# Altium PCB Smartshell_v1.PcbDoc
Units mil, origin at the board's own origin, x right, y up, seen from the top; angles counter-clockwise.
Board outline 1773.01 x 2124.01 mil, 2 copper layers (Top Layer, Bottom Layer); 65 components, 77 nets, 270 pads, 38 vias.
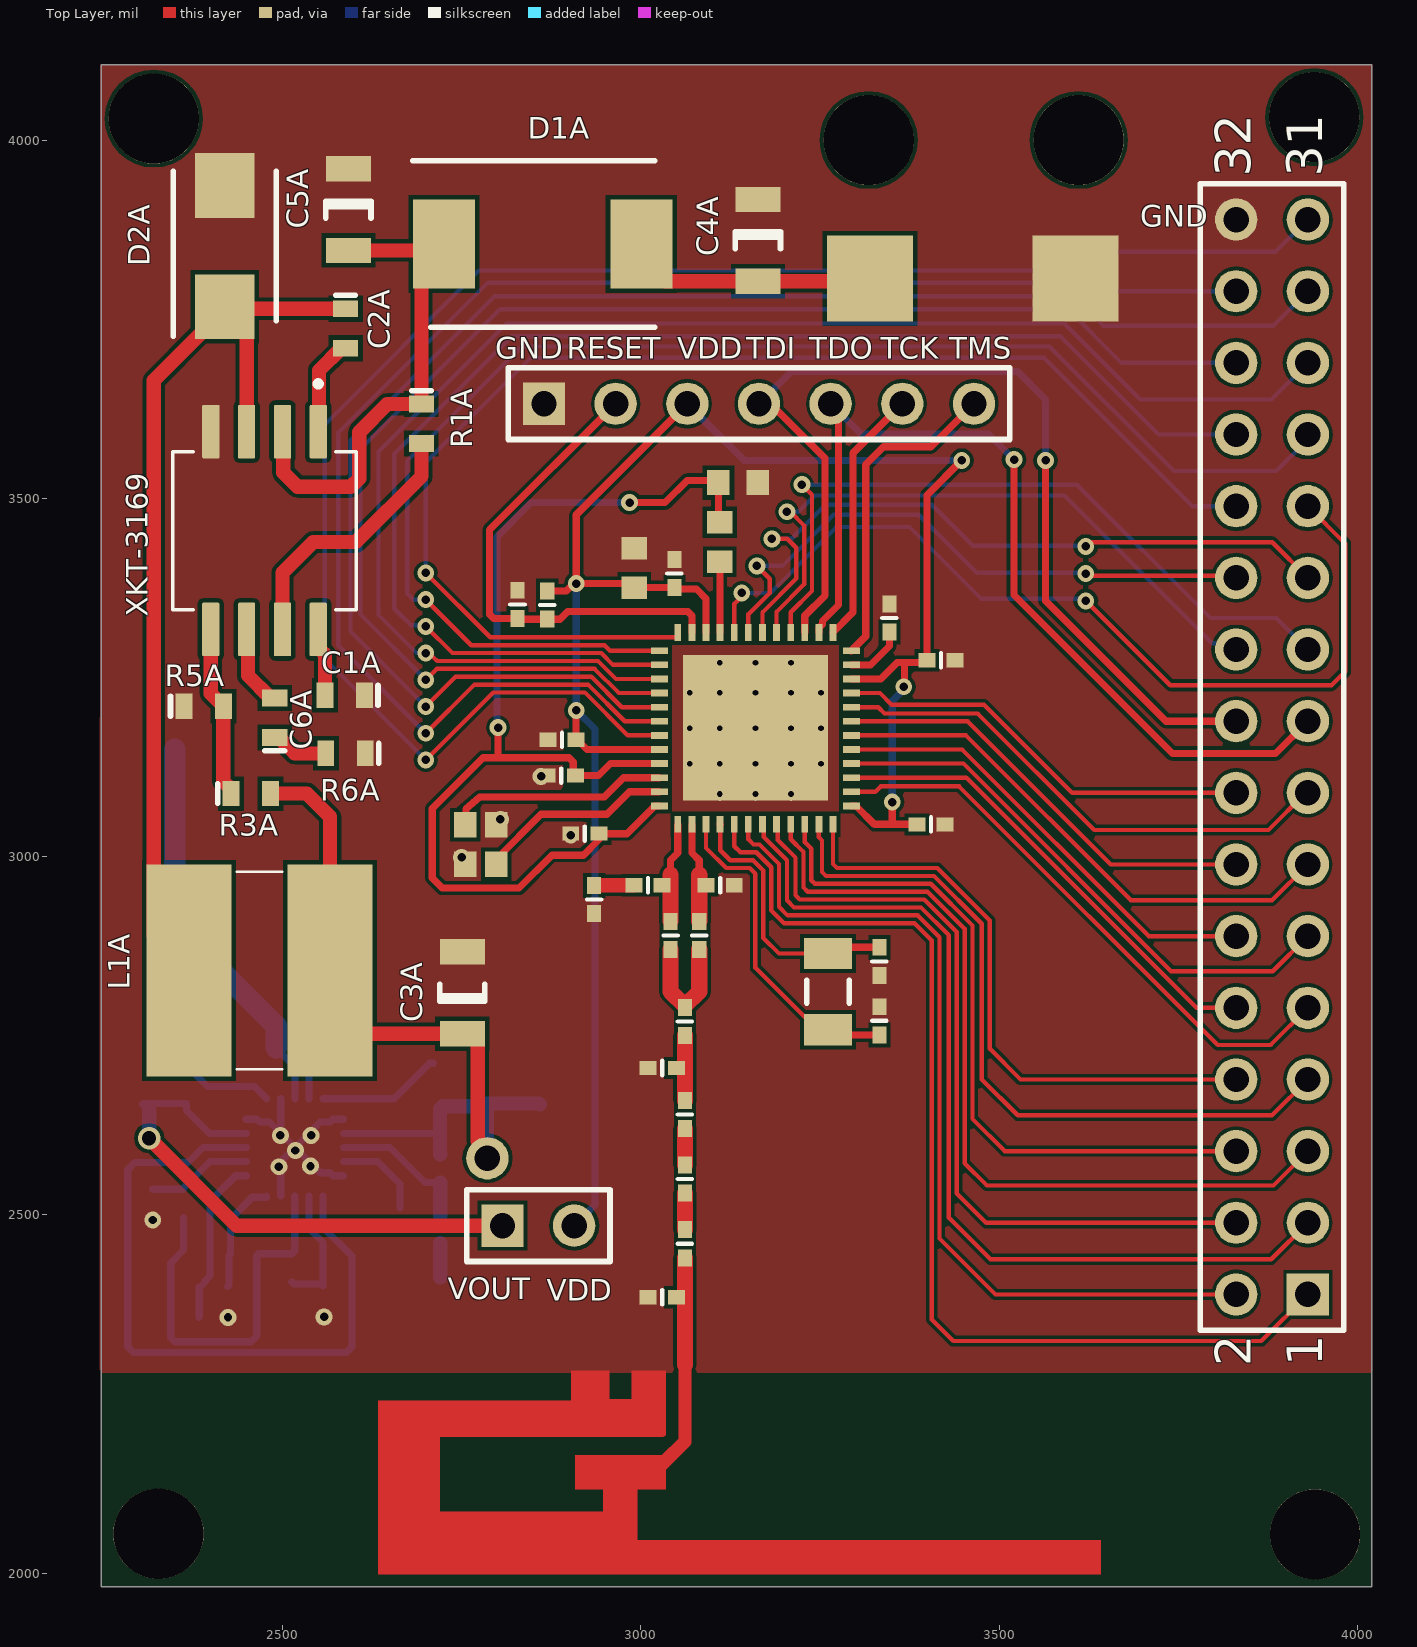
[diagram p0: Top Layer view]
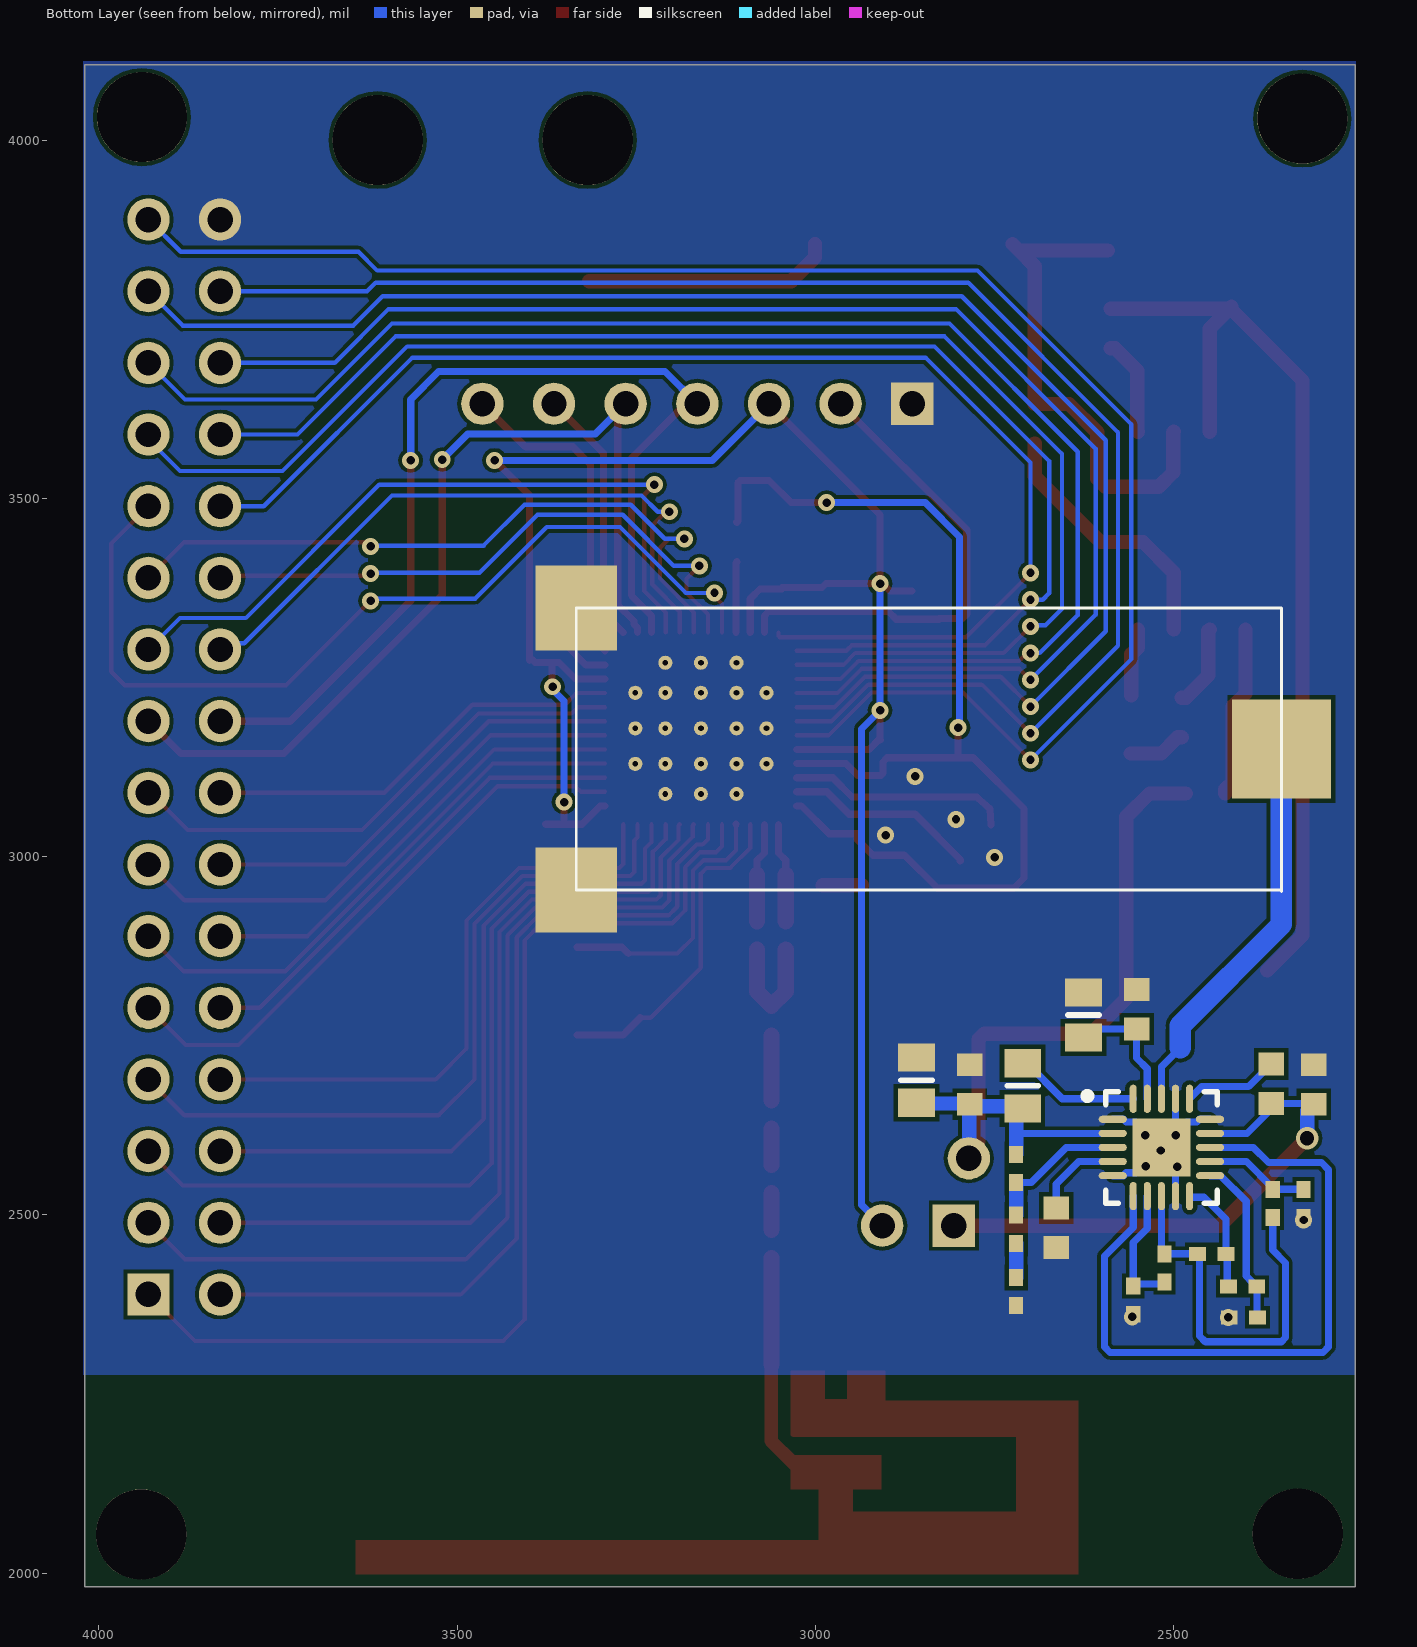
[diagram p1: Bottom Layer view, seen from below]

## Layer stack, top to bottom
Top Solder: solder mask 0.4, Solder Resist, Dk 3.5
Top Layer: signal copper 1.4
Dielectric 1: dielectric 12.6, FR-4, Dk 4.8
Bottom Layer: signal copper 1.4
Bottom Solder: solder mask 0.4, Solder Resist, Dk 3.5

## Board outline
2247,1980.99 4020,1981.01 4020.01,4105 2247,4105

## Design rules (kind name [scope] priority, off if disabled: settings)
Clearance [All] p1: gap=5 ignorepadtopadclearanceinfootprint=FALSE except(0: Arc-Hole Track-Hole SMDPad-Hole THPad-Hole Via-Hole Fill-Fill Fill-Poly Fill-Region Fill-Hole Poly-Poly Poly-Region Poly-Hole Region-Region Region-Hole Text-Hole; 6: SMDPad-Fill SMDPad-Poly SMDPad-Region)
PolygonConnect [All] p1: connectstyle=Direct reliefconductorwidth=10 reliefentries=4 polygonreliefangle="90 Angle" airgapwidth=10
RoutingVias [All] p1: holewidth=11.81 width=50 viastyle="Through Hole" minholewidth=11.81 minwidth=50 maxholewidth=11.81 maxwidth=50
SolderMaskExpansion [All] p1: expansion=4 istentingtop=FALSE
Width [All] p1: maxlimit=40 minlimit=5 preferedwidth=10 minimp=50.000000 maximp=50.000000 favimp=50.000000
30 further rules are at their usual default settings.

## Components (designator, comment, footprint, x,y, rotation, side; value= is the part's Value field where it differs from the comment)
C1A "Cap" 0603 2587,3225 r180 top value=0.1uF
C2A "Cap" 0603 2588,3737 r270 top value=10nF
C3 "Cap" C1206 3261.24,2811.5 r90 top value=10pF
C3A "Cap" 1206 2751,2810 r90 top value=22uF/16V
C4A "Cap" 1206 3163.56,3860 r270 top value="100nF NPO"
C5A "Cap" 1206 2592,3903 r270 top value=10uF/25V
C6A "Cap" 0603 2489,3194 r90 top value=3.3nF
D1A "SS510" DIOM7959X262N 2863,3855 r0 top
D2A "SS34B-HF" DIOM5336X320N 2419.5,3852 r90 top
L1A "15uH/2A" CD73NP331KC 2468,2841 r90 top
R1A "Res" 0603 2694,3604 r270 top value=100k
R3A "Res" 0603 2456,3088 r0 top value=44.2k
R5A "Res" 0603 2390,3210 r0 top value=10k
R6A "Res" 0603 2588,3144 r180 top value=6.8k
U1 "CC2652R1FRGZR" RGZ0048A 3160,3179 r90 top
XKT-3169 "XKT-3169" SOIC127P780X200-8N 2475,3455 r270 top (schematic designator U1A)
? "Comment" PCBComponent_1 2776.26,3017.9 r270 top
? "Comment" HDR2X16 3931,2389 r90 top
? "Comment" HDR1X2 2807,2485 r0 top
? "Comment" ? 3530.85,2756.45 r180 bottom
? "Comment" BQ25570 2517.31,2594.09 r180 bottom
? "Comment" 1608[0603] 2785,2682 r90 bottom
? "Comment" 6-0805_L 2859,2688 r90 bottom
? "Comment" 0402 2720,2564.81 r270 bottom
? "Comment" 0402 2720,2480 r270 bottom
? "Comment" 0402 2720,2393 r270 bottom
? "Comment" 1608[0603] 2664,2482 r270 bottom
? "Comment" 6-0805_L 2626,2779 r90 bottom
? "Comment" 1608[0603] 2552,2787 r90 bottom
? "Comment" 6-0805_L 2711,2680 r270 bottom
? "Comment" 1608[0603] 2364,2683 r270 bottom
? "Comment" 1608[0603] 2305,2682 r90 bottom
? "Comment" 0402 2513,2426 r270 bottom
? "Comment" 0402 2556.68,2381 r270 bottom
? "Comment" 0402 2447,2445.68 r180 bottom
? "Comment" 0402 2404,2400 r180 bottom
? "Comment" 0402 2362,2516 r90 bottom
? "Comment" 0402 2319,2516 r270 bottom
? "Comment" 0402 2403,2357 r0 bottom
? "Comment" 0402 2922,3032 r0 top
? "Comment" 0402 2889,3113 r0 top
? "Comment" 0402 2890,3163 r0 top
? "Comment" 0402 2828,3352 r270 top
? "Comment" 0402 2869.51,3351 r270 top
? "Comment" 1608[0603] 3136,3522 r0 top
? "Comment" 1608[0603] 2991,3403 r90 top
? "Comment" 0402 3047,3395 r90 top
? "Comment" 1608[0603] 3110,3439 r90 top
? "Comment" 0402 3347,3333 r90 top
? "Comment" 0402 3419,3274 r0 top
? "Comment" 0402 3405,3044.87 r0 top
? "Comment" HDR1X7 2865,3632 r0 top
? "Comment" 0402 3333,2770.79 r270 top
? "Comment" 0402 3333,2853.79 r270 top
? "Comment" 0402 3030,2385 r0 top
? "Comment" 0402 3061.58,2459.69 r270 top
? "Comment" 0402 3061.58,2550 r270 top
? "Comment" 0402 3061.57,2640 r270 top
? "Comment" 0402 3030,2705 r180 top
? "Comment" 0402 3061.57,2770 r90 top
? "Comment" 0402 2935,2940 r270 top
? "Comment" 0402 3110.79,2960 r180 top
? "Comment" 0402 3010,2960 r180 top
? "Comment" 0402 3081.57,2890 r90 top
? "Comment" 0402 3041.57,2890 r90 top

## Footprints (in the part's own frame and the unit in brackets; to place one, negate y for a bottom-side part, rotate by r counter-clockwise, add the part's x,y. Pads: shape width x height; smd on the part's side, far side on the other; paste and mask are expansions set on the pad)
6-0805_L [mm] "Chip Resistor, Body 2.0x1.2mm, IPC High Density"
  rect 1x1.3 smd: 1(-0.8,0) 2(0.8,0)
  silkscreen extent 0,-0.55 0,0.55, body extent -1.08,-0.7 1.07,0.7, height 0.7
0402 [mm] "Chip Capacitor, Body 1.0x0.5mm, IPC High Density"
  rect 0.6x0.5 smd: 1(-0.5,0) 2(0.5,0)
  body extent -0.55,-0.3 0.55,0.3, height 1.3
0603 [mm] "Surface Mount; Body 1.6 x 0.8 mm (LxW typ)"
  rect 0.6x0.9 smd: 1(-0.7,0) 2(0.7,0)
  silkscreen extent -1.18,-0.35 -1.18,0.35, body extent -0.8,-0.4 0.8,0.4, height 0.8
1206 [mm] "Surface Mount; Body 3.2 x 1.6 mm (LxW typ)"
  rect 0.9x1.6 smd: 1(-1.45,0) 2(1.45,0)
  silkscreen extent -0.3,-0.8 0.3,0.8, body extent -1.6,-0.8 1.6,0.8, height 1.1
1608[0603] [mm] "Chip Capacitor, Body 1.6x0.8mm, IPC High Density"
  rect 0.8x0.9 smd: 1(-0.7,0) 2(0.7,0)
  body extent -0.88,-0.48 0.87,0.48, height 1.3
BQ25570 [mm]
  oval 1x0.25 smd: 1(-1.725,1) 2(-1.725,0.5) 3(-1.725,0) 4(-1.725,-0.5) 5(-1.725,-1) 11(1.725,-1) 12(1.725,-0.5) 13(1.725,0) 14(1.725,0.5) 15(1.725,1)
  oval 0.25x1 smd: 6(-1,-1.725) 7(-0.5,-1.725) 8(0,-1.725) 9(0.5,-1.725) 10(1,-1.725) 16(1,1.725) 17(0.5,1.725) 18(0,1.725) 19(-0.5,1.725) 20(-1,1.725)
  rect 2.05x2.05 smd: 21(0,0)
  silkscreen extent -2.75,-1.97 1.98,1.98, body extent -1.83,-1.83 1.83,1.83, height 1
C1206 [mm] "Chip Capacitor, Body 3.2x1.6mm, IPC High Density"
  rect 1.1x1.7 smd: 1(-1.35,0) 2(1.35,0)
  silkscreen extent -0.4,-0.75 0.4,0.75, body extent -1.7,-0.9 1.7,0.9, height 1.3
CD73NP331KC [mm]
  rect 7.5x3 smd: 1(0,2.5) 2(0,-2.5)
  silkscreen extent -3.5,-0.8 3.5,0.8
DIOM5336X320N [mm]
  rect 2.3x2.1 smd: 1(-2.15,0) 2(2.15,0)
  silkscreen extent -3.2,-1.82 2.65,1.82, body extent -2.65,-1.83 2.65,1.83, height 3.2
DIOM7959X262N [mm]
  rect 2.2x3.15 smd: 1(-3.5,0) 2(3.5,0)
  silkscreen extent -4.6,-2.95 3.97,2.95, body extent -3.97,-2.95 3.97,2.95, height 2.62
HDR1X2 [mm] "Connector; Header; 2 Position"
  rect 1.5x1.5 hole 0.9: 1(0,0)
  round 1.5 hole 0.9: 2(2.54,0)
  silkscreen extent -1.27,-1.27 3.81,1.27
HDR1X7 [mm] "Connector; Header; 7 Position"
  rect 1.5x1.5 hole 0.9: 1(0,0)
  round 1.5 hole 0.9: 2(2.54,0) 3(5.08,0) 4(7.62,0) 5(10.16,0) 6(12.7,0) 7(15.24,0)
  silkscreen extent -1.27,-1.27 16.51,1.27
HDR2X16 [mm] "Connector; Header; 16x2 Position"
  rect 1.5x1.5 hole 0.9: 1(0,0)
  round 1.5 hole 0.9: 2(0,2.54) 3(2.54,0) 4(2.54,2.54) 5(5.08,0) 6(5.08,2.54) 7(7.62,0) 8(7.62,2.54) 9(10.16,0) 10(10.16,2.54) 11(12.7,0) 12(12.7,2.54) 13(15.24,0) 14(15.24,2.54) 15(17.78,0) 16(17.78,2.54) 17(20.32,0) 18(20.32,2.54) 19(22.86,0) 20(22.86,2.54) 21(25.4,0) 22(25.4,2.54) 23(27.94,0) 24(27.94,2.54) 25(30.48,0) 26(30.48,2.54) 27(33.02,0) 28(33.02,2.54) 29(35.56,0) 30(35.56,2.54) 31(38.1,0) 32(38.1,2.54)
  silkscreen extent -1.27,-1.27 39.37,3.81
PCBComponent_1 [mm]
  rect 0.9x0.8 smd: 1(-0.668,-0.541) 2(0.732,-0.541) 3(0.732,0.559) 4(-0.668,0.559)
  body extent -0.89,-0.76 1.02,0.76, height 0.25
RGZ0048A [mm]
  rect 0.6x0.24 smd paste+0 mask+0.051: 1(-3.4,2.75) 2(-3.4,2.25) 3(-3.4,1.75) 4(-3.4,1.25) 5(-3.4,0.75) 6(-3.4,0.25) 7(-3.4,-0.25) 8(-3.4,-0.75) 9(-3.4,-1.25) 10(-3.4,-1.75) 11(-3.4,-2.25) 12(-3.4,-2.75) 25(3.4,-2.75) 26(3.4,-2.25) 27(3.4,-1.75) 28(3.4,-1.25) 29(3.4,-0.75) 30(3.4,-0.25) 31(3.4,0.25) 32(3.4,0.75) 33(3.4,1.25) 34(3.4,1.75) 35(3.4,2.25) 36(3.4,2.75)
  rect 0.24x0.6 smd paste+0 mask+0.051: 13(-2.75,-3.4) 14(-2.25,-3.4) 15(-1.75,-3.4) 16(-1.25,-3.4) 17(-0.75,-3.4) 18(-0.25,-3.4) 19(0.25,-3.4) 20(0.75,-3.4) 21(1.25,-3.4) 22(1.75,-3.4) 23(2.25,-3.4) 24(2.75,-3.4) 37(2.75,3.4) 38(2.25,3.4) 39(1.75,3.4) 40(1.25,3.4) 41(0.75,3.4) 42(0.25,3.4) 43(-0.25,3.4) 44(-0.75,3.4) 45(-1.25,3.4) 46(-1.75,3.4) 47(-2.25,3.4) 48(-2.75,3.4)
  rect 5.15x5.15 smd paste-2.562 mask+0.051: 49(0.025,0)
  round 0.5 hole 0.203 mask+0.051: 50(0,-2.325) 51(0,-1.26) 52(1.26,-2.325) 53(1.26,-1.26) 54(2.325,-1.26) 55(-2.325,0) 56(-1.26,0) 57(-2.325,-1.26) 58(-1.26,-1.26) 59(-1.26,-2.325) 60(0,2.325) 61(0,1.26) 62(-1.26,2.325) 63(-1.26,1.26) 64(-2.325,1.26) 65(1.26,2.325) 66(1.26,1.26) 67(2.325,1.26) 68(1.26,0) 69(2.325,0) 70(0,0)
  body extent 0,0 0.25,0.25, height 0.25
SOIC127P780X200-8N [mm]
  rrect15% 1.9x0.61 smd: 1(-3.505,1.905) 2(-3.505,0.635) 3(-3.505,-0.635) 4(-3.505,-1.905) 5(3.505,-1.905) 6(3.505,-0.635) 7(3.505,0.635) 8(3.505,1.905)
  silkscreen extent -5.3,-3.25 2.8,3.25
? [mm]
  rect 2.9x3 smd: 3(5,5) 3(5,15)
  rect 3.5x3.5 smd: 3(30,10)
  silkscreen extent 5,4.95 30,15, body extent 4.95,2.29 29.97,17.91, height 0.25

## Part data
C1A C2A C3 C3A C4A C5A C6A: "Capacitor", LatestRevisionDate=17-Jul-2002, LatestRevisionNote="Re-released for DXP Platform.", PackageDescription="Radial Cap, Thru-Hole; 2 Leads; 0.3 in Pin Spacing", PackageReference=RAD-0.3, Published=8-Jun-2000, Publisher="Altium Limited"
D1A: "Schottky Diode", Manufacturer_Name="MDD (Microdiode Electronics)", Datasheet Link=https://datasheet.lcsc.com/szlcsc/1903042030_MDD-Jiangsu-Yutai-Elec-SS510_C19229.pdf, Height=2.62mm, Manufacturer_Part_Number=SS510
D2A: "Schottky Diode", Manufacturer_Name="Comchip Technology", Datasheet Link=https://www.mouser.jp/datasheet/2/80/SP-JB017_SS34B-HF_Thru._SS320B-HF_RevB-1847021.pdf, Height=3.2mm, Manufacturer_Part_Number=SS34B-HF
L1A: library part CD73NP-331KC, "Inductor", Manufacturer_Name=Sumida, Mouser Part Number=851-CD73NP-331KC, Datasheet Link=https://products.sumida.com/products/pdf/CD73.pdf, Height=4mm, Manufacturer_Part_Number=CD73NP-331KC, Mouser Price/Stock=https://www.mouser.com/Search/Refine.aspx?Keyword=851-CD73NP-331KC
R1A R3A R5A R6A: "Chip Resistor (Surface Mount)", Manufacturer="Generic Chip Res (TBD)"
U1: "No Description Available", Mfr_Name="Texas Instruments", Copyright="Copyright (C) 2022 Ultra Librarian. All rights reserved.", Manufacturer_Part_Number=CC2652R1FRGZR, RefDes=RefDes, Type=DEV
XKT-3169: "IC"

## Free pads (board coordinates)
  round 125.98 hole 125.98 unplated: 1(2320.52,4030) 1(2327,2055) 1(3318,4000) 1(3611,4000) 1(3940,4032) 1(3941,2054)
  rect 120x120 smd: 2(3320,3807) 2(3607,3807)
  round 59.06 hole 35.43: 7(2786,2579)

## Via types
v1: diameter 23.62, hole 11.81, Top Layer to Bottom Layer, 37 vias
v2: diameter 31.5, hole 19.68, Top Layer to Bottom Layer, 1 vias

## Nets (pads, with @x,y where several pads share a name; then routed paths per layer and width w, separated by ;. In a path a pad name is that pad's centre, name@x,y a point inside that pad or via, vN(x,y) a via of type N, cw(c..) or ccw(c..) an arc to the next point about the centre after c; other vN are vias at no path point)
DCDC_SW: ?.1@3110,3411.44 U1.33 | length 98.9
  Top Layer w10: ?.1@3110,3411.44 3110.79,3410.65 U1.33
DCOUPL: ?.1@3347,3313.32 U1.23 | length 83.5
  Top Layer w10: U1.23 3320.67,3267.58 3347,3293.91 ?.1@3347,3313.32
GND: ?.1@2585.23,2633.46 ?.1@2828,3371.68 ?.1@2865,3632 ?.1@2869.32,3113 ?.1@2870.32,3163 ?.1@2902.32,3032 ?.1@3010.32,2385 ?.1@3130.47,2960 ?.1@3333,2790.47 ?.2@2305,2709.56 ?.2@2319,2496.31 ?.2@2422.69,2357 ?.2@2552,2814.56 ?.2@2556.68,2361.31 ?.2@2626,2810.5 ?.2@2664,2454.44 ?.2@2720,2373.31 ?.2@2754.96,2989.08 ?.2@2785,2709.56 ?.2@2859,2719.5 ?.2@2935,2920.31 ?.2@2991,3430.56 ?.2@3010.31,2705 ?.2@3047,3414.69 ?.2@3049.69,2385 ?.2@3061.58,2440 ?.2@3163.56,3522 ?.2@3333,2834.1 ?.2@3347,3352.69 ?.2@3424.69,3044.87 ?.2@3438.69,3274 ?.3@3334,2953.3 ?.3@3334,3347 ?.4@2798.27,3044.2 ?.5@2585.23,2554.72 ?.9@2497.63,2526.17 ?.15@2449.4,2633.46 ?.17@2497.63,2662 ?.21@2517.31,2594.09 ?.32 C1A.1 C3A.2 C4A.1 C5A.1 D2A.2 pad.2@3607,3807 R5A.1 R6A.1 U1.49 U1.50 U1.51 U1.52 U1.53 U1.54 U1.55 U1.56 U1.57 U1.58 U1.59 U1.60 U1.61 U1.62 U1.63 U1.64 U1.65 U1.66 U1.67 U1.68 U1.69 U1.70 XKT-3169.4 | length 526
  Top Layer w22.65: 3061.58,2291 ?.2@3061.58,2440
  Bottom Layer w10: ?.15@2449.4,2633.46 2464.01,2633.46 2468.02,2629.44 2481.96,2629.44 ?.21@2497.63,2613.77 ; ?.9@2497.63,2526.17 2497.63,2574.4 ?.21@2517.31,2594.09 ; ?.17@2497.63,2662 ?.21@2497.63,2613.77 ; ?.5@2585.23,2554.72 2570.62,2554.72 2566.61,2558.73 2552.67,2558.73 ?.21@2517.31,2594.09 ; ?.1@2585.23,2633.46 2570.62,2633.46 2566.61,2629.44 2552.67,2629.44 ?.21@2517.31,2594.09 ; ?.21@2497.63,2613.77 ?.21@2517.31,2594.09
  other v1: 2424,2356.86 2558,2357.71 2319,2492.86 2495.11,2567.12 2539.11,2567.97 2518.11,2589.86 2497.11,2610.86 2540.11,2610.86 2750,2998.86 2902.32,3029.86 2804,3051.86 2861,3112
GPIO0: ?.1@3931,2389 U1.5 | length 1489.2
  Top Layer w6: U1.5 3130.47,3014.53 3139,3006 3161.11,3006 3182,2985.11 3182,2925 3200,2907 3382,2907 3406,2883 3406,2354 3436,2324 3866,2324 ?.1@3931,2389
GPIO1: ?.2@3831,2389 U1.6 | length 1246.1
  Top Layer w6: U1.6 3150.16,3024.33 3157.49,3017 3165.67,3017 3193,2989.67 3193,2930 3205,2918 3386.56,2918 3417,2887.56 3417,2467 3495,2389 ?.2@3831,2389
GPIO2: ?.3@3931,2489 U1.7 | length 1306.8
  Top Layer w6: U1.7 3171.57,3043.42 3171.57,3027.43 3204,2995 3204,2939 3214,2929 3391.11,2929 3430,2890.11 3430,2496 3488,2438 3880,2438 ?.3@3931,2489
GPIO3: ?.4@3831,2489 U1.8 | length 1128
  Top Layer w6: U1.8 3191.25,3043.42 3191.25,3023.3 3216,2998.56 3216,2946 3222,2940 3395.67,2940 3441,2894.67 3441,2530 3482,2489 ?.4@3831,2489
GPIO4: ?.5@3931,2589 U1.9 | length 1183.4
  Top Layer w6: U1.9 3209.25,3024.33 3227,3006.58 3227,2957 3233,2951 3400.23,2951 3452,2899.23 3452,2572 3483,2541 3883,2541 ?.5@3931,2589
GPIO5: ?.6@3831,2589 U1.10 | length 989.5
  Top Layer w6: U1.10 3228.9,3020.23 3238,3011.13 3238,2967 3243,2962 3404.78,2962 3463,2903.78 3463,2634 3508,2589 ?.6@3831,2589
GPIO6: ?.7@3931,2689 U1.11 | length 1035.1
  Top Layer w6: U1.11 3248.58,3027 3253,3022.58 3253,2978.51 3258.51,2973 3409.34,2973 3476,2906.34 3476,2689 3526,2639 3881,2639 ?.7@3931,2689
GPIO7: ?.8@3831,2689 U1.12 | length 847.5
  Top Layer w6: U1.12 3268.27,2989.73 3274,2984 3413.89,2984 3487,2910.89 3487,2732 3530,2689 ?.8@3831,2689
GPIO8: ?.9@3931,2789 U1.14 | length 811.4
  Top Layer w6: U1.14 3327.42,3090.42 3335,3098 3444.3,3098 3805.3,2737 3879,2737 ?.9@3931,2789
GPIO9: ?.10@3831,2789 U1.15 | length 670.1
  Top Layer w6: U1.15 3454.45,3110.1 3775.56,2789 ?.10@3831,2789
GPIO10: ?.11@3931,2889 U1.16 | length 777.5
  Top Layer w6: U1.16 3450.32,3129.79 3740.11,2840 3882,2840 ?.11@3931,2889
GPIO11: ?.12@3831,2889 U1.17 | length 645
  Top Layer w6: U1.17 3448.53,3149.47 3709,2889 ?.12@3831,2889
GPIO12: ?.13@3931,2989 U1.18 | length 753.2
  Top Layer w6: U1.18 3453.84,3169.16 3684,2939 3881,2939 ?.13@3931,2989
GPIO13: ?.14@3831,2989 U1.19 | length 619.9
  Top Layer w6: U1.19 3456.16,3188.84 3656,2989 ?.14@3831,2989
GPIO14: ?.15@3931,3089 U1.20 | length 729.7
  Top Layer w6: U1.20 3331.47,3208.53 3340.16,3199.84 3470.16,3199.84 3633,3037 3876,3037 3928,3089 ?.15@3931,3089
GPIO15: ?.16@3831,3089 U1.21 | length 594.8
  Top Layer w6: U1.21 3333.79,3228.21 3350,3212 3479,3212 3602,3089 ?.16@3831,3089
GPIO16: ?.5@3265,3632 ?.17@3931,3189 U1.26 | length 1332.5
  Top Layer w10: U1.26 3248.58,3319.39 3253.54,3324.35 3253.54,3328.81 3276,3351.27 3276,3607.73 3265,3618.73 ?.5@3265,3632 ; v1(3521,3554) 3521,3365 3742,3144 3886,3144 ?.17@3931,3189
  Bottom Layer w10: ?.5@3265,3632 3307.39,3589.61 3485.39,3589.61 v1(3521,3554)
GPIO17: ?.4@3165,3632 ?.18@3831,3189 U1.27 | length 1429.6
  Top Layer w10: ?.4@3165,3632 3181,3632 3257,3556 3257,3364.17 3228.9,3336.07 U1.27 ; v1(3565,3553) 3565,3357 3733,3189 ?.18@3831,3189
  Bottom Layer w10: ?.4@3165,3632 3210,3677 3526,3677 3565,3638 v1(3565,3553)
GPIO18: ?.19@3931,3289 U1.28 | length 1025.5
  Top Layer w6: U1.28 3209.21,3340.9 3239,3370.68 3239,3505 v1@3225.81,3518.19
  Top Layer w10: v1(3225,3519) v1@3225.81,3518.19
  Bottom Layer w6: v1(3225,3519) 3609,3519 3795,3333 3887,3333 ?.19@3931,3289
GPIO19: ?.20@3831,3289 U1.29 | length 922.5
  Top Layer w6: U1.29 3189.53,3341.53 3228,3380 3228,3462.02 3208.77,3481.25 v1(3204,3481.25)
  Bottom Layer w6: v1(3204,3481.25) 3220.18,3481.25 3242.93,3504 3591,3504 3797.15,3297.85 3822.15,3297.85 ?.20@3831,3289
GPIO20: ?.21@3931,3389 U1.30 | length 991.1
  Top Layer w6: U1.30 3169.84,3340.84 3217,3388 3217,3431 3204.5,3443.5 v1(3183,3443.5) ; v1(3621,3433) 3626.77,3438.77 3881.23,3438.77 ?.21@3931,3389
  Bottom Layer w6: v1(3183,3443.5) 3210.5,3443.5 3258,3491 3406.23,3491 3463.23,3434 v1@3621,3434
GPIO21: ?.22 U1.31 | length 847.3
  Top Layer w6: U1.31 3150.16,3338.16 3180,3368 3180,3387.75 v1(3162,3405.75) ; v1(3621,3395) 3624,3392 3828,3392 ?.22
  Bottom Layer w6: v1(3162,3405.75) 3197.75,3405.75 3269,3477 3388,3477 3469,3396 v1@3621,3396
GPIO22: ?.23 U1.32 | length 1291.6
  Top Layer w6: U1.32 3130.47,3352.7 3141,3363.23 v1(3141,3368) ; v1(3621,3357) 3739,3239 3964,3239 3983,3258 3983,3437 ?.23
  Bottom Layer w6: v1(3141,3368) 3181,3368 3273,3460 3375,3460 3475,3360 3618,3360 v1(3621,3357)
GPIO23: ?.24 U1.36 | length 1826.2
  Top Layer w6: v1(2700,3395.86) 2789.86,3306 3050.01,3306 3051.73,3307.72 U1.36
  Bottom Layer w6: v1(2700,3395.86) 2700,3550 2846,3696 3563,3696 3770,3489 ?.24
GPIO24: ?.25 U1.37 | length 1990.4
  Top Layer w6: v1(2700,3358.57) 2763.57,3295 2949.34,3295 2957.07,3287.27 U1.37
  Bottom Layer w6: v1(2700,3358.57) 2683,3358.57 2674,3367.57 2674,3552 2834,3712 3570,3712 3744,3538 3887,3538 3931,3582 ?.25
GPIO25: ?.26 U1.38 | length 1918.3
  Top Layer w6: v1(2700,3321.29) 2737.29,3284 2944.78,3284 2961.2,3267.58 U1.38
  Bottom Layer w6: v1(2700,3321.29) 2698.47,3322.81 2679.19,3322.81 2656,3346 2656,3562 2820,3726 3586,3726 3723,3589 ?.26
GPIO26: ?.27 U1.39 | length 2096.8
  Top Layer w6: v1@2702.53,3281.47 v1(2700,3284) 2704.77,3284 2713.77,3275 2714,3275 2716,3273 2940.23,3273 2965.33,3247.9 U1.39
  Bottom Layer w6: v1(2700,3284) 2687,3284 2634,3337 2634,3565 2813,3744 3591,3744 3697,3638 3880,3638 ?.27
GPIO27: ?.28 U1.40 | length 2041.7
  Top Layer w6: v1@2701,3245.71 v1(2700,3246.71) 2715.29,3262 2935.67,3262 2969.46,3228.21 U1.40
  Bottom Layer w6: v1(2700,3246.71) 2609,3337.71 2609,3569 2804,3764 3595.97,3764 3670.97,3689 ?.28
GPIO28: ?.29 U1.41 | length 2232.1
  Top Layer w6: v1(2700,3209.43) 2741.57,3251 2931.11,3251 2973.58,3208.53 U1.41
  Bottom Layer w6: v1(2700,3209.43) 2595,3314.43 2595,3581 2796,3782 3604.12,3782 3645.12,3741 3883,3741 ?.29
GPIO29: ?.30 U1.42 | length 2190.4
  Top Layer w6: v1(2700,3172.14) 2767.86,3240 2926.56,3240 2977.71,3188.84 U1.42
  Bottom Layer w6: v1(2700,3172.14) 2578,3294.14 2578,3592 2787,3801 3613.84,3801 3625.84,3789 ?.30
GPIO30: ?.31 U1.43 | length 2406.8
  Top Layer w6: v1(2700,3134.86) 2794.14,3229 2922,3229 2981.84,3169.16 U1.43
  Bottom Layer w6: v1(2700,3134.86) 2559.21,3275.65 2559.21,3603.21 2774,3818 3611.84,3818 3637.84,3844 3886,3844 ?.31
LBOOST: ?.1@2711,2711.5 ?.20@2556.68,2662 | length 174.8
  Bottom Layer w10: ?.20@2556.68,2662 2655.6,2662 2705.09,2711.5 ?.1@2711,2711.5
LBUCK: ?.1@2364,2710.56 ?.16@2477.94,2662 | length 134.1
  Bottom Layer w10: ?.1@2364,2710.56 2395.56,2679 2460.94,2679 ?.16@2477.94,2662
Match_c1: ?.1@3061.58,2569.68 ?.2@3061.58,2620.31 | length 50.6
  Top Layer w22.65: ?.1@3061.58,2569.69 ?.2@3061.58,2620.31
Match_c2: ?.1@3061.58,2479.37 ?.2@3061.58,2530.31 | length 50.9
  Top Layer w22.65: ?.1@3061.58,2479.37 ?.2@3061.58,2530.31
Match_T: ?.1@3049.68,2705 ?.1@3061.57,2750.32 ?.1@3061.58,2659.68 | length 92
  Top Layer w10: ?.1@3060.63,2749.37 ?.1@3061.57,2750.32
  Top Layer w22.65: ?.1@3061.58,2659.69 3061.58,2705 ?.1@3061.58,2750.31
NetC1A_2: C1A.2 XKT-3169.8 | length 95.9
  Top Layer w20: XKT-3169.8 2550,3291.61 2559.44,3282.17 C1A.2
NetC2A_1: C2A.1 D2A.1 L1A.1 XKT-3169.3 | length 1340.4
  Top Layer w20: L1A.1 2320.52,2890.06 2320.52,3664.44 2419.5,3763.42 D2A.1 D2A.1@2422.29,3764.56 ; XKT-3169.3 2450,3736.85 D2A.1@2422.29,3764.56 ; C2A.1 D2A.1@2422.29,3764.56
NetC2A_2: C2A.2 XKT-3169.1 | length 135.6
  Top Layer w20: XKT-3169.1 2551,3593.99 2551,3678.35 2582.09,3709.44 C2A.2
NetC3A_1: 
NetC4A_2: C4A.2 D1A.2 pad.2@3320,3807 | length 353.4
  Top Layer w6: pad.2@3315.91,3802.91 pad.2@3320,3807
  Top Layer w20: D1A.2 3000.8,3836.3 3034.1,3802.99 3163.48,3802.99 C4A.2 pad.2@3315.91,3802.91
NetC5A_2: C5A.2 D1A.1 R1A.1 XKT-3169.2 | length 704.9
  Top Layer w20: XKT-3169.2 2501,3591.99 2501,3536 2521,3516 2595.28,3516 2607,3527.72 2607,3592.28 2646.28,3631.56 R1A.1 2694,3823.8 D1A.1@2716.12,3845.91 ; C5A.2 D1A.1@2716.12,3845.91 ; D1A.1 D1A.1@2716.12,3845.91
NetC6A_1: C6A.1 R6A.2 | length 80.7
  Top Layer w20: C6A.1 2494.91,3166.44 2517.35,3144 R6A.2
NetC6A_2: C6A.2 XKT-3169.6 | length 115.1
  Top Layer w20: XKT-3169.6 2452.01,3315 2452.01,3252.65 2483.09,3221.56 C6A.2
NetR1A_2: R1A.2 XKT-3169.7 | length 374.6
  Top Layer w20: XKT-3169.7 2500,3396 2543,3439 2602.42,3439 2694,3530.58 R1A.2
NetR2A_1: 
NetR3A_1: R3A.1 R5A.2 XKT-3169.5 | length 240.8
  Top Layer w20: XKT-3169.5 2400,3227.56 R5A.2 2417.56,3104.79 2428.44,3093.91 R3A.1
OK_HYST: ?.1@2423.69,2400 ?.2@2427.32,2445.68 ?.10@2477.94,2526.17 | length 160.4
  Bottom Layer w10: ?.1@2423.69,2400 2425.5,2401.82 2425.5,2443.87 2427.32,2445.68 2427.32,2494 2457.87,2524.55 2477.87,2524.55 2477.94,2524.63 ?.10@2477.94,2526.17
OK_PROG: ?.1@2383.32,2357 ?.2@2384.32,2400 ?.11@2449.4,2554.72 | length 234.8
  Bottom Layer w10: ?.1@2383.32,2357 2383.82,2357.5 2383.82,2399.5 2385.78,2399.5 2391.13,2404.84 2391.13,2406.81 2399,2414.68 2399,2518.92 2434.8,2554.72 ?.11@2449.4,2554.72
RESET: ?.2@2828,3332.31 ?.2@2869.51,3331.31 ?.2@2965,3632 U1.35 | length 682.7
  Top Layer w10: ?.2@2827,3331.31 2869.51,3331.31 2887.31,3331.31 2898,3342 3065.56,3342 3071.42,3336.14 U1.35 ; ?.2@2828,3332.31 2794.86,3332.31 2789,3338.17 2789,3456 ?.2@2965,3632
RF_ALL: ?.1@3041.57,2870.32 ?.1@3081.57,2870.32 ?.2@3061.57,2789.69 | length 175.9
  Top Layer w10: ?.2@3061.57,2789.69 ?.2@3061.57,2791.65
  Top Layer w22.65: ?.1@3041.57,2870.32 3041.57,2811.65 3061.57,2791.65 3081.57,2811.65 ?.1@3081.57,2870.32
RF_N: ?.2@3081.57,2909.69 ?.2@3091.1,2960 U1.2 | length 139.5
  Top Layer w10: U1.2@3071.42,3045 3071.42,3005 3081.57,2994.84 3081.57,2974.69
  Top Layer w22.65: ?.2@3081.57,2909.69 3081.57,2974.69
RF_P: ?.1@3029.68,2960 ?.2@3041.57,2909.69 U1.1 | length 139.6
  Top Layer w10: 3041.57,2974.69 3041.57,2995 3051.57,3005 3051.73,3005 U1.1@3051.73,3045
  Top Layer w22.65: ?.2@3041.57,2909.69 3041.57,2974.69
RF_P_1: ?.1@2935,2959.68 ?.2@2990.31,2960 | length 55.4
  Top Layer w10: ?.1@2935,2959.68 ?.1@2935.16,2959.84 ; ?.2@2990.16,2959.84 ?.2@2990.31,2960
  Top Layer w20: ?.1@2935.16,2959.84 ?.2@2990.16,2959.84
sms_r: 
TCK: ?.6@3365,3632 U1.25 | length 359.2
  Top Layer w10: U1.25 3296,3340.59 3296,3563 ?.6@3365,3632
TMS: ?.7@3465,3632 U1.24 | length 478.4
  Top Layer w10: U1.24 3314,3307.41 3314,3547.14 3338.86,3572 3405,3572 3465,3632 ?.7@3441,3632
VBAT: ?.3@2349.75,3150.15 ?.18@2517.31,2662 | length 557.6
  Bottom Layer w10: 2491,2733 2517.31,2706.69 ?.18@2517.31,2662 ; 2491,2758 2491,2764
  Bottom Layer w30: ?.3@2349.75,3150.15 2349.75,2905.25 2491,2764 ; 2491,2733 2491,2758
VBAT_OK: ?.6@2556.68,2526.17 ?.13@2449.4,2594.09 | length 971.7
  Bottom Layer w10: ?.13@2449.4,2594.09 2389.09,2594.09 2368,2573 2294,2573 2284,2563 2284,2316 2292,2308 2589,2308 2596.86,2315.86 2596.86,2442.36 2556.68,2482.53 ?.6@2556.68,2526.17
VBAT_OV: ?.1@2556.68,2400.68 ?.2@2513,2406.32 ?.7@2537,2526.17 | length 179.7
  Bottom Layer w10: ?.2@2513,2406.32 2515.81,2403.5 2553.87,2403.5 2556.68,2400.68 2556.68,2461.32 2537,2481 ?.7@2537,2526.17
VDDR: ?.1@3108.44,3522 ?.2@2908.69,3113 ?.2@2941.69,3032 ?.2@3110,3466.56 U1.45 U1.48 | length 1554.3
  Top Layer w10: v1(2801,3180) 2801,3138 ; v1(2984.42,3494) 3034,3494 3065,3525 3105.44,3525 3108.44,3522 3108.44,3468.12 ?.2@3110,3466.56 ; U1.45@3025.87,3130.06 U1.45 2957.79,3129.79 2941,3113 2908.69,3113 2905.86,3115.83 2905.86,3132.14 2900,3138 2801,3138 ; U1.48 3019.61,3070.73 2980.87,3032 2941.69,3032 2941.69,3023.69 2920,3002 2876,3002 2830,2956 2723,2956 2709,2970 2709,3067 2780,3138 2801,3138
  Bottom Layer w10: v1(2801,3180) 2799.19,3181.81 2799.19,3446.19 2847,3494 v1(2984.42,3494)
VDDS: ?.1@2869.51,3370.68 ?.1@2991,3375.44 ?.1@3047,3375.32 ?.1@3385.32,3044.87 ?.1@3399.32,3274 ?.2@2907,2485 ?.2@2909.69,3163 ?.3@3065,3632 U1.13 U1.22 U1.34 U1.44 | length 2836.3
  Top Layer w10: ?.1@2865.8,3370.68 2869.51,3370.68 2896,3370.68 2906.31,3381 v1(2910,3381) ; v1(2910,3204) 2909.84,3203.84 2909.84,3163.16 2909.69,3163 2911.65,3163 2925.18,3149.47 U1.44 ; ?.3@3065,3632 2910,3477 v1(2910,3381) ; U1.34 3091.1,3359.9 3077.65,3373.35 3047,3373.35 3047,3375.32 3046.87,3375.44 2991,3375.44 2985.44,3381 v1(2910,3381) ; U1.13 3300.39,3070.73 3325.98,3045.14 3350,3045.14 ; U1.22 3334.9,3247.9 3358,3271 3368,3271 ; v1(3351,3076) 3351,3046.14 3350,3045.14 ; v1(3367,3237) 3368,3238 3368,3271 ; ?.1@3376.46,3045.14 3350,3045.14 ; ?.1@3394.32,3274 3391.32,3271 3368,3271 ; ?.1@3399.32,3274 3399.32,3504.32 v1(3448,3553)
  Bottom Layer w10: ?.2@2907,2485 2936,2514 2936,3178 v1(2910,3204) v1(2910,3381) ; ?.3@3065,3632 3144,3553 v1(3448,3553) ; v1(3351,3076) 3351,3217.31 3367,3233.31 v1(3367,3237)
VIN_DC: ?.1@2720,2584.5 ?.1@2785,2654.44 ?.1@2859,2656.5 ?.2@2585.23,2613.77 ?.2@2711,2648.5 C3A.1 L1A.2 pad.7 R3A.2 | length 1169
  Top Layer w20: R3A.2 2534,3088 2566.43,3055.57 L1A.2 2566.43,2801.97 2615.48,2752.91 C3A.1 2764.78,2752.91 2772.5,2745.2 2772.5,2603.07 2786,2589.57 pad.7
  Bottom Layer w10: ?.2@2585.23,2613.77 2718.07,2613.77
  Bottom Layer w20: 2718.07,2613.77 2719.84,2612 ; ?.1@2720,2584.5 2719.84,2584.66 2719.84,2612 ; pad.7 2785.5,2579.5 2785.5,2653.94 ?.1@2785,2654.44 ; ?.1@2859.5,2653.94 2857.97,2655.47 2786.03,2655.47 ?.1@2785,2654.44 ; 2719.84,2612 2719.84,2647.31 2724,2651.47 2782.03,2651.47 ?.1@2785,2654.44
VOC_10M: ?.1@2720,2412.68 ?.2@2720,2460.31 | length 47.6
  Bottom Layer w20: ?.1@2720,2412.68 ?.2@2720,2460.31
VOC_SAMP: ?.1@2720,2499.68 ?.2@2720,2545.13 ?.3@2585.23,2594.09 | length 200.5
  Bottom Layer w10: ?.3@2585.23,2594.09 2650.1,2594.09 2699.06,2545.13 ?.2@2720,2545.13
  Bottom Layer w20: ?.1@2720,2499.68 ?.2@2720,2545.13
VOUT: ?.1@2305,2654.44 ?.1@2807,2485 ?.2@2364,2655.44 ?.14@2449.4,2613.77 | length 762.4
  Top Layer w20: v2(2314,2607) 2436,2485 ?.1@2807,2485
  Bottom Layer w10: ?.1@2314,2645.44 2305,2654.44 2306,2655.44 2364,2655.44 2365.97,2655.44 2365.97,2645.8 2398,2613.77 ?.14@2449.4,2613.77
  Bottom Layer w20: v2(2314,2607) ?.1@2314,2645.44
VOUT_SET: ?.1@2319,2535.68 ?.2@2362,2535.68 ?.12@2449.4,2574.4 | length 147.6
  Bottom Layer w10: ?.1@2319,2535.68 2362,2535.68 2362,2537.65 2398.75,2574.4 ?.12@2449.4,2574.4
VRDIV: ?.1@2362,2496.32 ?.1@2466.69,2445.69 ?.1@2513,2445.68 ?.8@2517.32,2526.17 | length 545
  Bottom Layer w10: ?.1@2362,2496.32 2362,2451 2344,2433 2344,2328.86 2349.86,2323 2456,2323 2464,2331 2464,2443 2466.69,2445.69 2513,2445.69 2517.24,2449.92 2517.24,2526.09 ?.8@2517.32,2526.17
VREF_SAMP: ?.1@2664,2509.56 ?.4@2585.23,2574.4 | length 125.2
  Bottom Layer w10: ?.4@2585.23,2574.4 2632.6,2574.4 2664,2543 ?.1@2664,2509.56
VSTORE: ?.1@2552,2759.44 ?.1@2626,2747.5 ?.19@2537,2662 | length 182.6
  Bottom Layer w10: ?.19@2537,2662 2537,2704 2552,2719 2552,2759.44 2614.06,2759.44 ?.1@2626,2747.5
X32K_Q1: ?.2@3333,2751.1 C3.1 U1.3 | length 459.8
  Top Layer w6: U1.3 3091.1,3012.09 3119.2,2984 3152,2984 3160,2976 3160,2845 3230,2775 C3.1@3244.58,2775
  Top Layer w10: C3.1@3244.58,2775 C3.1 3268.49,2751.1 ?.2@3333,2751.1
X32K_Q2: ?.1@3333,2873.47 C3.2 U1.4 | length 376.8
  Top Layer w6: U1.4@3111.06,3044.87 3111.06,3008.94 3125,2995 3156.56,2995 3171,2980.56 3171,2886.51 3192.87,2864.65 C3.2
  Top Layer w10: U1.4 U1.4@3111.06,3044.87 ; C3.2 3270.06,2873.47 ?.1@3333,2873.47
X48M_N: ?.1@2754.96,3044.2 U1.46 | length 309.6
  Top Layer w10: ?.1@2754.96,3044.2 2756.32,3066.48 2775,3083 2949,3083 2976.1,3110.1 U1.46
X48M_P: ?.3@2798.27,2989.08 U1.47 | length 269.1
  Top Layer w10: ?.3@2798.01,2994.18 2798.01,2996.15 2860.86,3059 2953,3059 2984.42,3090.42 U1.47

## Polygon pours and split planes (outlines as drawn)
GND on Bottom Layer "Bottom Layer-GND" (solid, remove dead copper, pour order 20): 2246,4110 4022,4110 4022,2277 2246,2277
GND on Top Layer "Top Layer-GND" (solid, remove dead copper, pour order 18): 2246,4109 2249,4106 4021,4106 4021,2259 4020,2280 3998,2280 2245.01,2280

## Other copper
Top Layer:
  region net GND: 2633.71,2240.37 2658.71,2240.37 2902.71,2241.35 2902.71,2282.37 2956,2282.37 2956,2243 2987.34,2243 2987.34,2282.37 3034.74,2282.37 3034.74,2194.36 cw(c3030.72,2194.36) 3030.72,2190.34 2719.78,2190.34 2719.78,2085.52 2947.97,2085.52 2947.97,2116.86 2908.6,2116.86 2908.6,2164.26 3029.14,2164.26 3052.71,2187.83 3052.71,2292.2 cw(c3061.72,2292.2) 3070.74,2292.2 3070.74,2184.09 cw(c3061.74,2184.08) 3068.1,2177.72 3034.74,2144.36 3034.74,2116.86 2995.37,2116.86 2995.37,2046.15 3641.74,2046.15 3641.74,1998.34 2633.71,1998.34

## Silkscreen, mask and mechanical layers (free items; w line width, h text height)
Top Overlay:
  text "GND" at 3697,3879 h30
  text "GND" at 2797,3695 h30
  text "RESET" at 2897,3695 h30
  text "VDD" at 3051,3695 h30
  text "TDI" at 3147,3695 h30
  text "TDO" at 3234.84,3695 h30
  text "TCK" at 3335,3695 h30
  text "TMS" at 3430.56,3695 h30
  text "VOUT" at 2731,2382 h30
  text "VDD" at 2869,2380 h30
Mechanical 1:
  lines w11.81: 2247.01,4105 4020.01,4105 4020,1981.01 2247,1980.99 2247,4105 ; 2247,4105 2247.01,4105

## Text inside footprints (layer, text, board x,y; h text height)
?: Top Overlay "2" at 3851,2289 h50 r90; Top Overlay "1" at 3951,2289 h50 r90; Top Overlay "31" at 3951,3949 h50 r90; Top Overlay "32" at 3851,3949 h50 r90